# Altium PCB ADC_Breakout.PcbDoc
Units mil, origin at the board's own origin, x right, y up, seen from the top; angles counter-clockwise.
Board outline 895.67 x 925.2 mil, 2 copper layers (Top Layer, Bottom Layer); 8 components, 9 nets, 40 pads, 4 vias.
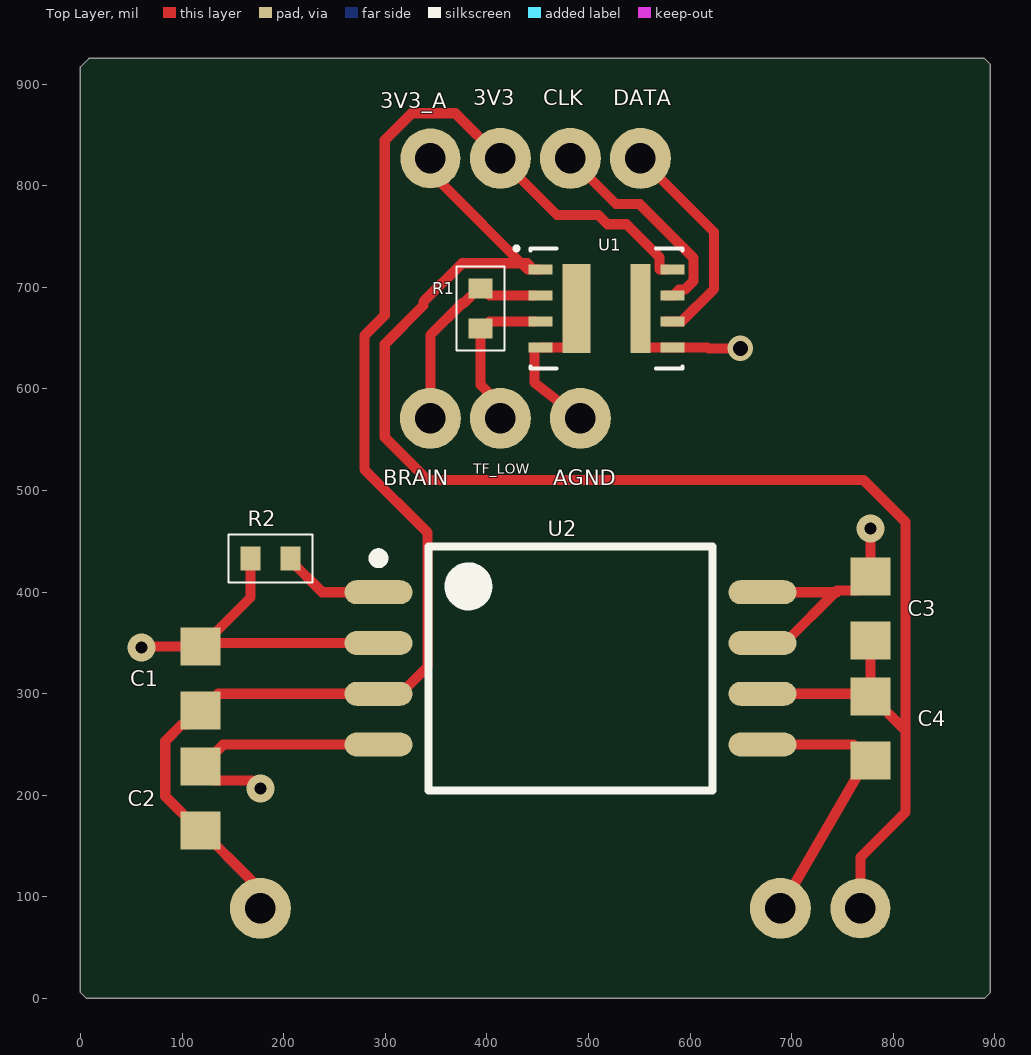
[diagram p0: Top Layer view]
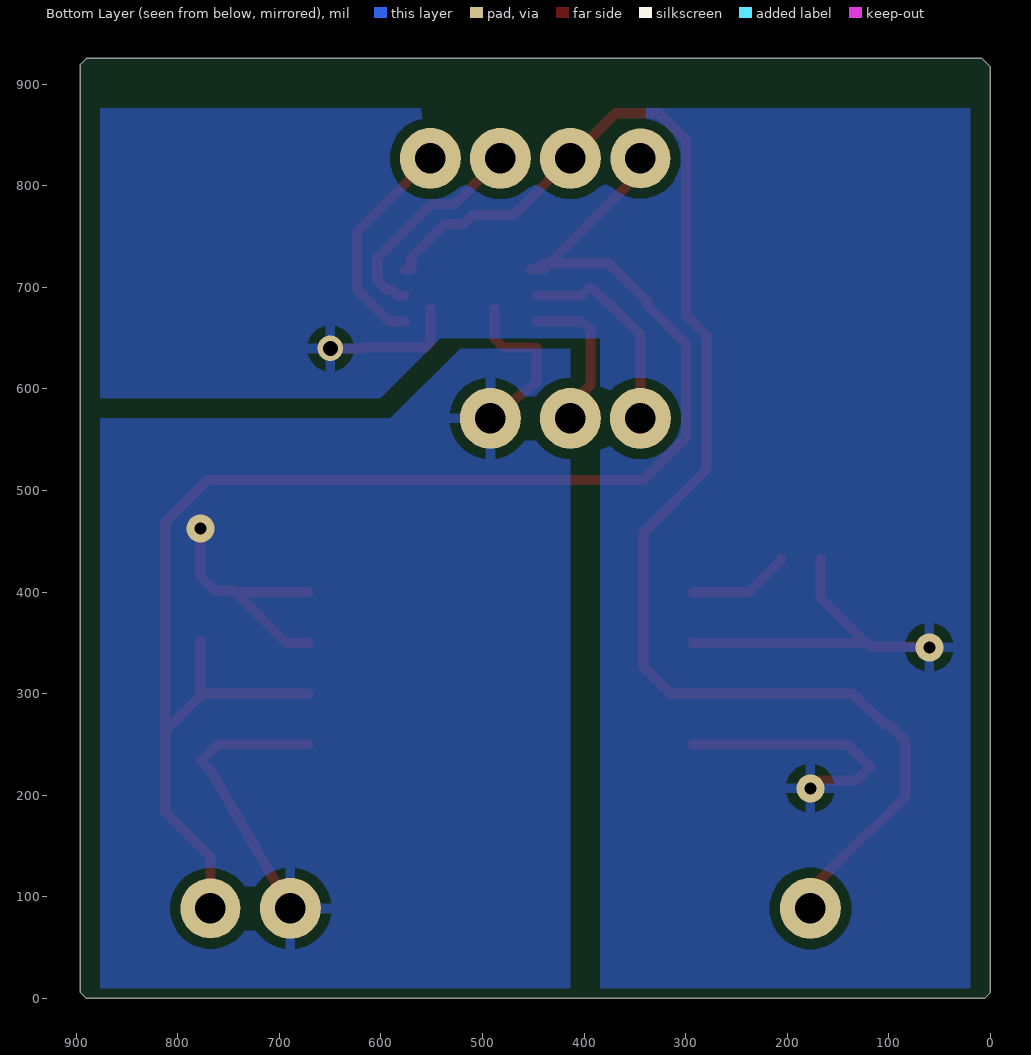
[diagram p1: Bottom Layer view, seen from below]
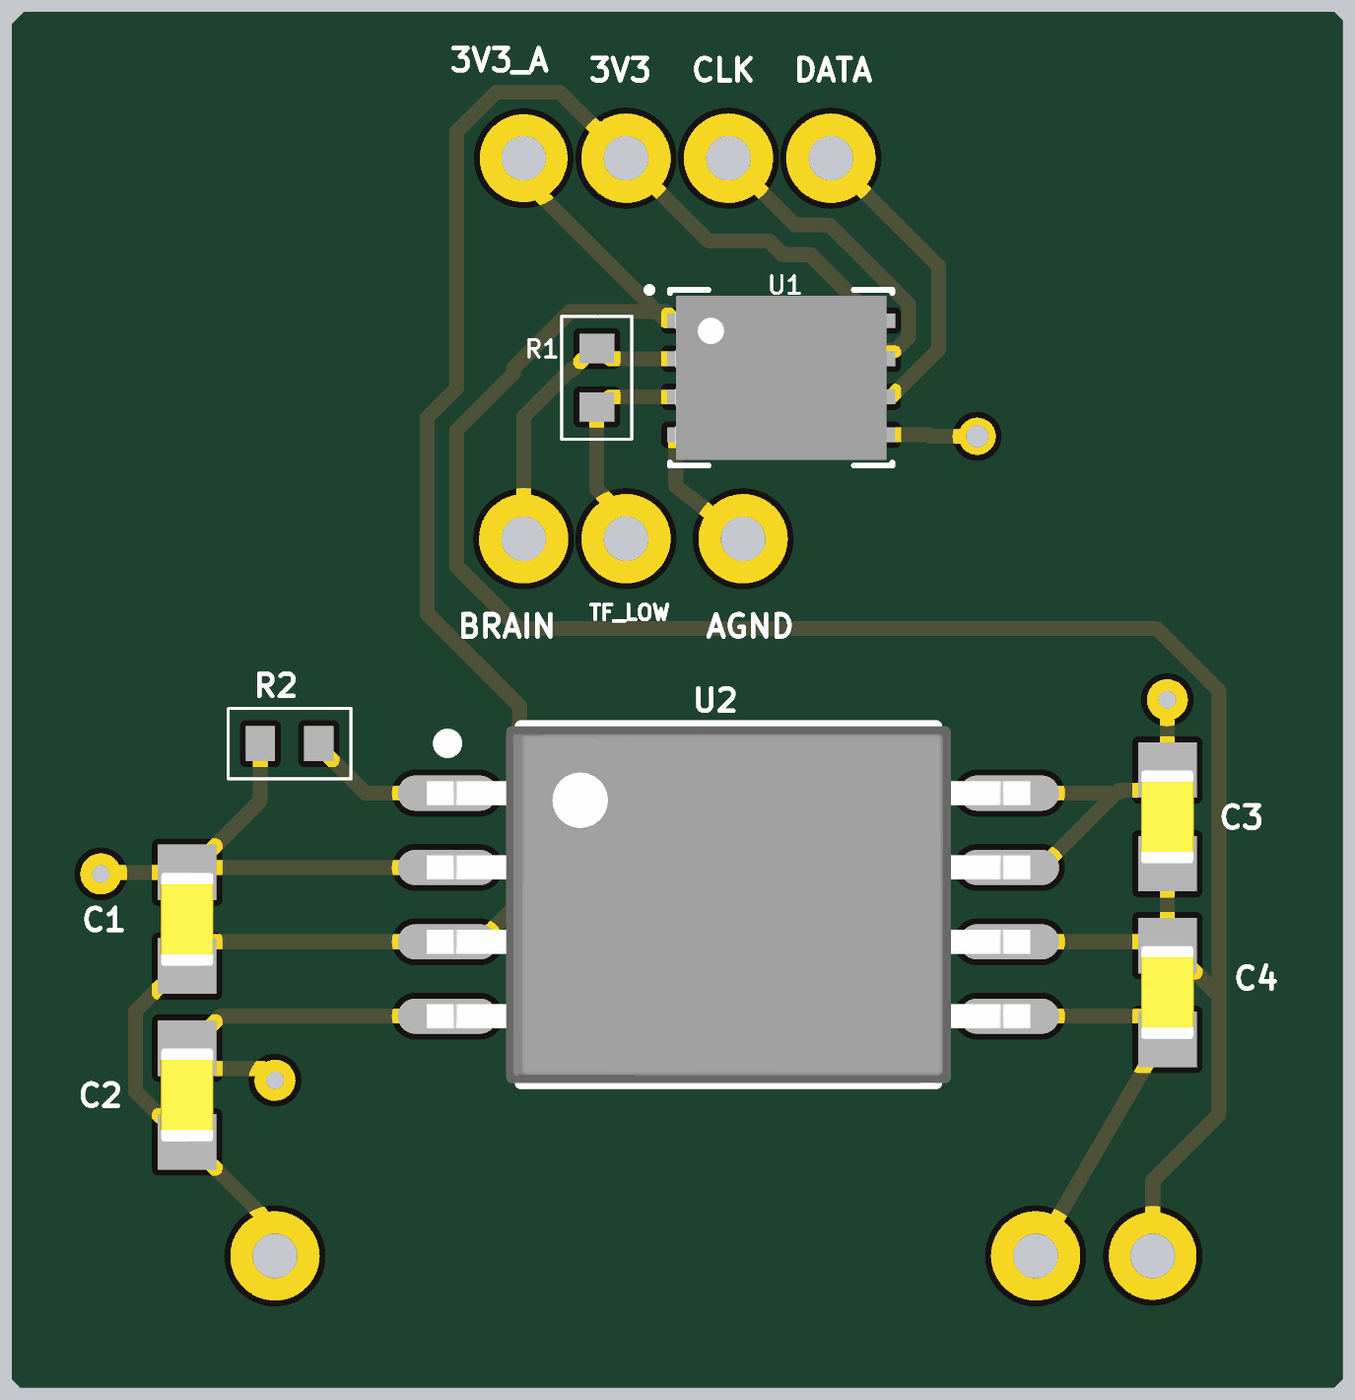
[diagram p2: 3D render of the assembled board from above, using the file's embedded part models]

## Layer stack, top to bottom
Top Solder: solder mask 0.4, Solder Resist, Dk 3.5
Top Layer: signal copper 1.4
Dielectric 1: dielectric 12.6, FR-4, Dk 4.8
Bottom Layer: signal copper 1.4
Bottom Solder: solder mask 0.4, Solder Resist, Dk 3.5

## Board outline
0,5.86 5.86,0 889.81,0 895.67,5.86 895.67,919.34 889.81,925.2 8.31,925.2 0,916.89

## Design rules (kind name [scope] priority, off if disabled: settings)
Clearance [All] p1: gap=10 ignorepadtopadclearanceinfootprint=FALSE
PolygonConnect [All] p1: connectstyle=Relief reliefconductorwidth=10 reliefentries=4 polygonreliefangle="90 Angle" airgapwidth=10
RoutingVias [All] p1: holewidth=28 width=50 viastyle="Through Hole" minholewidth=28 minwidth=50 maxholewidth=28 maxwidth=50
SolderMaskExpansion [All] p1: expansion=4 istentingtop=FALSE
SupplyNets "Schematic Supply Nets_4" [InNet('AGND')] p1: voltage=0.000
SupplyNets "Schematic Supply Nets_3" [InNet('GND')] p2: voltage=0.000
SupplyNets "Schematic Supply Nets_2" [InNet('3V3')] p3: voltage=0.000
SupplyNets "Schematic Supply Nets_1" [InNet('3V3_A')] p4: voltage=0.000
Width [All] p1: maxlimit=10 minlimit=10 preferedwidth=10 minimp=50.000000 maximp=50.000000 favimp=50.000000
30 further rules are at their usual default settings.

## Components (designator, comment, footprint, x,y, rotation, side; value= is the part's Value field where it differs from the comment)
C1 "Cap" CAPC1608X05N 118.11,314.96 r270 top value=10u
C2 "Cap" CAPC1608X05N 118.11,196.85 r270 top value=0.1u
C3 "Cap" CAPC1608X05N 777.56,383.86 r270 top value=0.22u
C4 "Cap" CAPC1608X05N 777.56,265.75 r90 top value=10u
R1 "Res1" 0402_Res 393.7,679.13 r270 top value=10
R2 "Res1" 0402_Res 187.01,433.07 r0 top value=4.7k
U1 "ADC" SON65P350X100_HS-9N 517.72,679.13 r0 top
U2 "ADUM6028-3WBRIZ-RL" ADUM6028-3WBRIZ-RL 482.28,324.8 r0 top

## Footprints (in the part's own frame and the unit in brackets; to place one, negate y for a bottom-side part, rotate by r counter-clockwise, add the part's x,y. Pads: shape width x height; smd on the part's side, far side on the other; paste and mask are expansions set on the pad)
0402_Res [mm]
  rect 0.5x0.6 smd: 1(-0.5,0) 2(0.5,0)
  silkscreen extent -1.05,-0.6 1.05,0.6
ADUM6028-3WBRIZ-RL [mm]
  oval 1.7x0.6 smd: 1(-4.8,1.905) 2(-4.8,0.635) 3(-4.8,-0.635) 4(-4.8,-1.905) 5(4.8,-1.905) 6(4.8,-0.635) 7(4.8,0.635) 8(4.8,1.905)
  silkscreen extent -4.92,-3.05 3.55,3.05, body extent -5.16,-3.05 5.16,3.05, height 2.65
CAPC1608X05N [mm] "Chip Capacitor, 2-Leads, Body 1.55x0.85mm, IPC Medium Density"
  rect 0.95x1 smd: 1(-0.8,0) 2(0.8,0)
  body extent -0.8,-0.45 0.8,0.45, height 0.5
SON65P350X100_HS-9N [mm] "SON, 8-Leads, Body 2.70x3.50mm, Pitch 0.65mm, Thermal Pad 2.23x0.70mm, IPC Medium Density"
  rect 0.6x0.25 smd: 1(-1.65,0.975) 2(-1.65,0.325) 3(-1.65,-0.325) 4(-1.65,-0.975) 5(1.65,-0.975) 6(1.65,-0.325) 7(1.65,0.325) 8(1.65,0.975)
  rect 0.7x2.23 smd: 9(-0.75,0)
  rect 0.5x2.23 smd: 10(0.85,0)
  silkscreen extent -2.3,-1.5 1.9,1.55, body extent -1.8,-1.4 1.8,1.4, height 1

## Part data
C1 C2 C3 C4: "Capacitor", LatestRevisionDate=17-Jul-2002, LatestRevisionNote="Re-released for DXP Platform.", PackageDescription="Radial Cap, Thru-Hole; 2 Leads; 0.3 in Pin Spacing", PackageReference=RAD-0.3, Published=8-Jun-2000, Publisher="Altium Limited"
R1 R2: "Resistor", LatestRevisionDate=17-Jul-2002, LatestRevisionNote="Re-released for DXP Platform.", PackageDescription="Axial Device, Thru-Hole; 2 Leads; 0.3 in Pin Spacing", PackageReference=AXIAL-0.3, Published=8-Jun-2000, Publisher="Altium Limited"
U1: Supplier Part Number 1=296-AMC0106M05DENRCT-ND, Supplier 1=DigiKey

## Free pads (board coordinates)
  round 60 hole 30: 2(482.28,826.77) 2(551.18,826.77) 3(177.17,88.58) 3(413.39,826.77) 5(344.49,570.87) 6(413.39,570.87) 7(492.13,570.87) 7(688.98,88.58)
  round 59 hole 30: 4(344.49,826.77) 4(767.72,88.58)

## Via types
v1: diameter 27.56, hole 11.81, Top Layer to Bottom Layer, 3 vias
v2: diameter 25, hole 15, Top Layer to Bottom Layer, 1 vias

## Nets (pads, with @x,y where several pads share a name; then routed paths per layer and width w, separated by ;. In a path a pad name is that pad's centre, name@x,y a point inside that pad or via, vN(x,y) a via of type N, cw(c..) or ccw(c..) an arc to the next point about the centre after c; other vN are vias at no path point)
3V3: C1.2 C2.2 pad.3 U1.8 U2.3 | length 1403.4
  Top Layer w10: C1.2 104.41,269.76 99.93,269.76 83.43,253.26 83.43,199.06 117.13,165.35 C2.2 119.09,165.35 167.6,116.85 167.6,98.15 pad.3@177.17,88.58 ; C1.2@119.09,283.46 135.43,299.8 314.96,299.8 341.77,326.61 341.77,458.3 279.49,520.58 279.49,652.26 299.49,672.26 299.49,844.7 326.06,871.27 368.89,871.27 413.39,826.77 469,771.16 509.61,771.16 518.84,761.93 537.43,761.93 570.12,729.24 570.12,717.6 570.2,717.52 U1.8@576.77,717.52
3V3_A: C3.2 C4.2 pad.4 U1.1 U2.6 | length 1588.5
  Top Layer w10: pad.4@344.49,826.77 353.86,817.4 353.86,803.77 440.12,717.52 ; U1.1 446.02,717.52 439.88,723.66 375.68,723.66 337.58,685.57 337.58,682.07 299.49,643.98 299.49,552.23 341.29,510.42 770.44,510.42 812.24,468.61 812.24,183.57 767.72,139.04 pad.4@767.72,88.58 ; U2.6 775,299.8 C4.2 ; C3.2 C4.2 ; 812.24,263.54 778.54,297.24 C4.2
\V\_\I\S\O\_\E\N\: R2.2 U2.1 | length 101.5
  Top Layer w10: R2.2 206.69,431.1 237.99,399.8 U2.1
ADC_CLK: pad.2@482.28,826.77 U1.7 | length 217
  Top Layer w10: pad.2@482.28,826.77 527.12,781.93 545.71,781.93 545.88,781.77 550.47,781.77 603.58,728.65 603.58,706.39 594.8,697.6 589.17,697.6 583.5,691.93 U1.7@576.77,691.93
ADC_DATA: pad.2@551.18,826.77 U1.6 | length 218.6
  Top Layer w10: pad.2@551.18,826.77 623.58,754.37 623.58,698.1 591.9,666.42 576.85,666.42 U1.6@576.77,666.34
AGND: C3.1 C4.1 pad.7 U1.4 U1.9 U2.5 U2.7 U2.8 | length 698.5
  Top Layer w10: U1.4@446.85,640.75 446.85,606.3 pad.7@492.13,570.87 ; U1.4 479.41,640.75 488.19,649.53 U1.9 ; U2.5 761.02,249.8 776.57,234.25 C4.1 767.72,224.41 pad.7@688.98,88.58 ; U2.7 692.91,349.8 744.76,401.65 763.86,401.65 C3.1 v1(777.56,462.6) ; U2.8 744.76,399.8
FROM_BRAIN: pad.5 R1.1 U1.2 | length 204.4
  Top Layer w10: pad.5 344.49,653.1 375.68,684.29 377.2,684.29 391.73,698.82 R1.1 ; R1.1@395.67,698.82 402.56,691.93 U1.2@446.85,691.93
GND: C1.1 C2.1 R2.1 U1.5 U1.10 U2.2 U2.4 | length 727.6
  Top Layer w10: v1@59.05,344.49 61.02,346.46 C1.1 121.46,349.8 U2.2 ; C2.1 131.81,214.65 169.21,214.65 v1(177.17,206.69) ; C2.1@119.09,228.35 140.55,249.8 U2.4 ; C1.1@119.09,346.46 167.32,394.68 R2.1 ; U1.10 551.18,645.59 556.02,640.75 U1.5 ; U1.5@583.58,640.75 617.11,640.75 618.09,639.76 v2(649.61,639.76)
  other v1: 60.04,345.47
TF_LOW: pad.6 R1.2 U1.3 | length 150.8
  Top Layer w10: R1.2 393.7,604.08 413.39,584.4 pad.6 ; R1.2@395.67,659.45 402.56,666.34 U1.3@446.85,666.34

## Polygon pours and split planes (outlines as drawn)
AGND on Bottom Layer "AGND_L02_P001" (solid, pour order 1): 413.39,9.84 413.39,639.76 521.65,639.76 590.55,570.87 875.98,570.87 875.98,9.84
GND on Bottom Layer "GND_L02_P000" (solid, pour order 0): 383.86,9.84 383.86,649.61 541.34,649.61 600.39,590.55 875.98,590.55 875.98,875.98 19.68,875.98 19.68,9.84

## Silkscreen, mask and mechanical layers (free items; w line width, h text height)
Top Overlay:
  text "3V3" at 386.86,878.98 h15
  text "CLK" at 455.76,878.98 h15
  text "DATA" at 524.65,878.98 h15
  text "3V3_A" at 295.28,875.98 h15
  text "TF_LOW" at 386.86,516.48 h10
  text "BRAIN" at 298.28,504.97 h15
  text "AGND" at 465.6,504.97 h15
Mechanical 1:
  the board outline again, w10